# Altium PCB LimeSDR-Micro_mPCIe_1v4.PcbDoc (part 6 of 11)
Units mm, origin at the board's own origin, x right, y up, seen from the top; angles counter-clockwise.
Board outline 50.8 x 29.7 mm, 8 copper layers (Top, L2, L3, L4, L5, L6, L7, Bottom), stack 0.925 mm thick; 664 components, 386 nets, 2358 pads, 843 vias.
Unrouted connection lines stored in the file: 28.
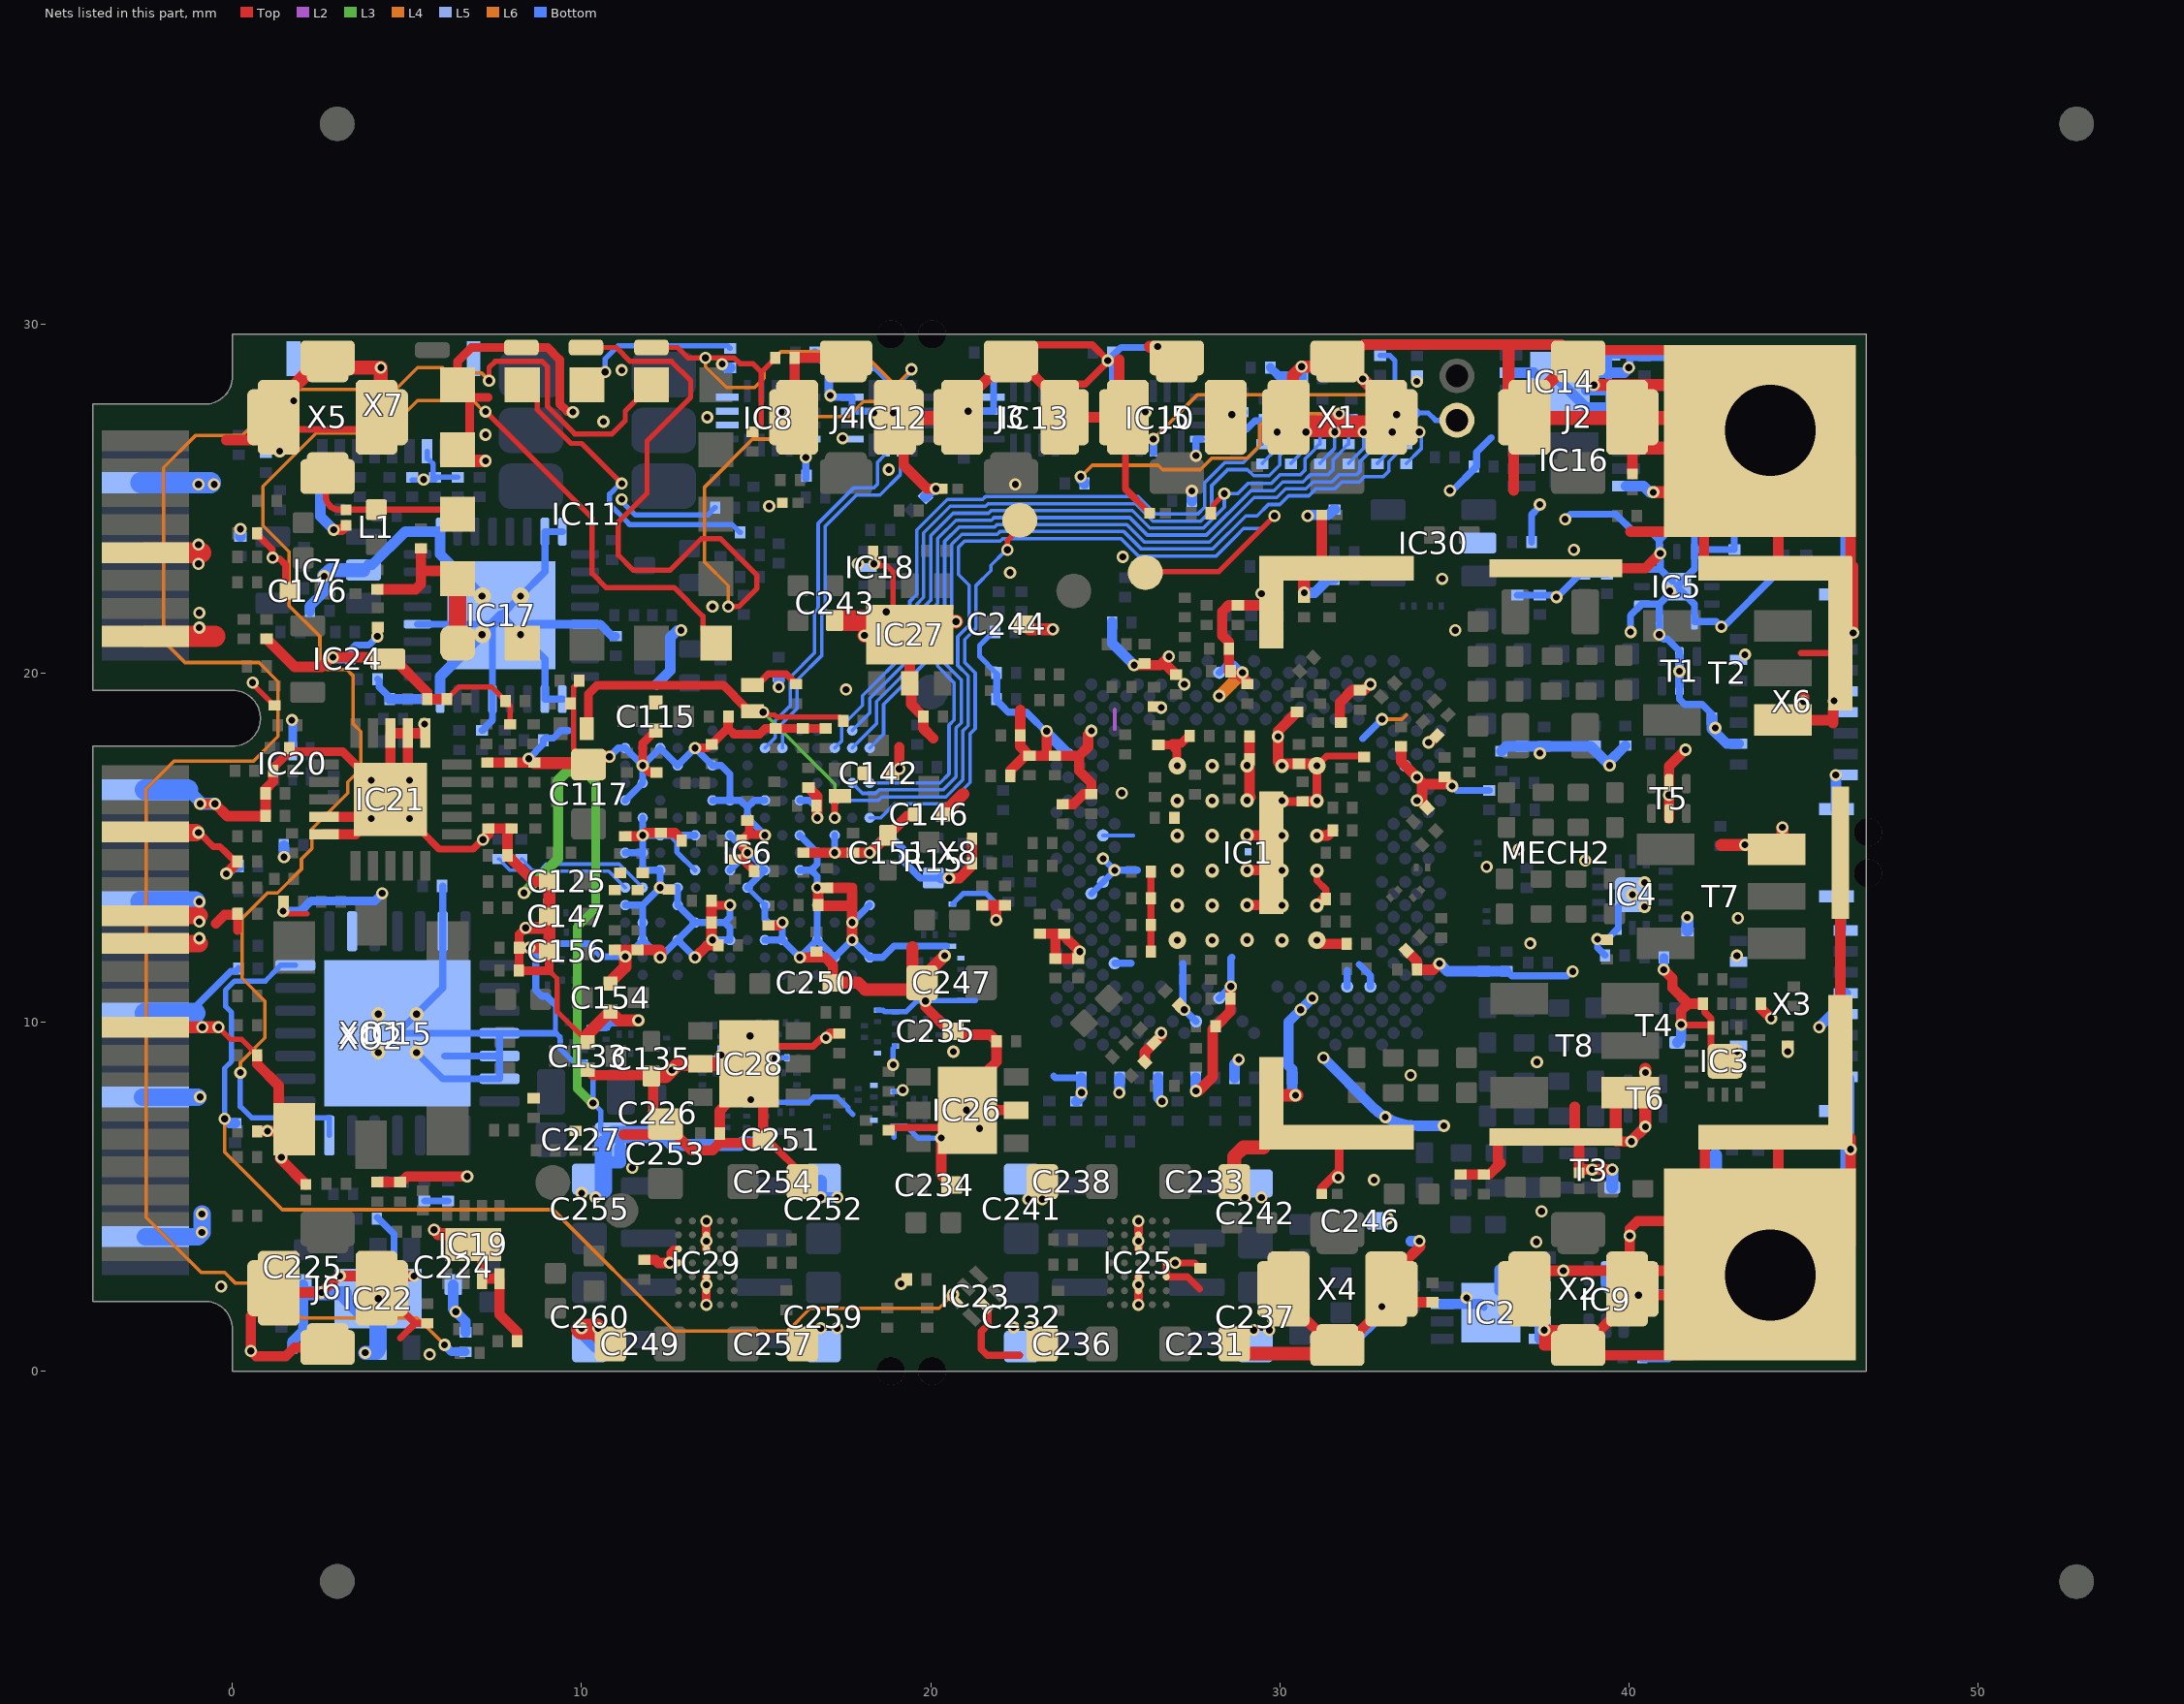
[diagram p10: the nets of this part, all layers, seen from the top]

## Via types
v1: diameter 0.35, hole 0.2, Top to Bottom, tented both sides, 684 vias
v2: diameter 0.35, hole 0.2, L5 to Bottom, tented both sides, 117 vias
v3: diameter 0.4, hole 0.2, Top to Bottom, tented both sides, 30 vias
v4: diameter 0.5, hole 0.2, Top to Bottom, tented both sides, 12 vias

## Nets (pads, with @x,y where several pads share a name; then routed paths per layer and width w, separated by ;. In a path a pad name is that pad's centre, name@x,y a point inside that pad or via, vN(x,y) a via of type N, cw(c..) or ccw(c..) an arc to the next point about the centre after c; other vN are vias at no path point) (continued)
GND: C1.1 C3.2 C4.1 C6.2 C7.1 C9.2 C11.1 C14.2 C16.1 C19.2 C21.1 C24.2 C26.1 C28.2 C29.1 C30.1 C31.2 C32.2 C33.1 C34.1 C35.2 C36.2 C37.2 C38.2 C42.2 C43.2 C44.2 C45.2 C46.2 C47.2 C48.2 C49.2 C50.2 C51.2 C52.2 C53.2 C54.2 C55.1 C56.2 C57.2 C58.2 C59.2 C60.2 C61.2 C62.2 C63.2 C64.2 C65.2 C66.2 C67.2 C68.2 C69.1 C70.2 C71.2 C72.2 C73.2 C74.2 C75.2 C76.1 C77.2 C78.1 C79.1 C80.2 C81.2 C82.2 C83.2 C84.2 C85.2 C86.2 C87.2 C88.2 C89.2 C90.2 C91.2 C92.2 C93.2 C94.2 C95.2 C96.2 C97.2 C98.2 C99.2 C100.2 C101.2 C102.2 C103.2 C104.2 C105.2 C106.2 C107.2 C108.2 C109.2 C113.2 C115.2 C117.1 C118.1 C119.1 C120.1 C121.1 C122.2 C125.1 C126.2 C127.2 C128.1 C129.1 C131.1 C132.2 C133.2 C134.1 C135.1 C136.1 C137.1 C138.1 C139.1 C140.1 C141.1 C142.2 C143.1 C144.1 C145.1 C146.2 C147.1 C148.2 C149.2 C150.1 C151.1 C152.1 C153.1 C154.2 C155.1 C156.1 C157.1 C158.1 C159.1 C160.1 C161.1 C162.2 C163.1 C164.2 C165.2 C166.2 C167.2 C168.2 C169.2 C170.1 C171.2 C172.1 C173.2 C174.2 C175.1 C176.1 C177.2 C178.2 C179.2 C180.2 C181.2 C182.1 C183.1 C186.1 C187.2 C188.1 C189.1 C190.1 C193.1 C194.2 C195.2 C196.1 C197.1 C198.2 C199.1 C200.1 C201.1 C202.2 C203.1 C204.2 C205.2 C206.1 C207.1 C208.1 C209.1 C210.2 C213.1 C214.1 C215.2 C216.1 C219.1 C220.1 C222.1 C223.2 C224.1 C225.1 C226.1 C227.1 C228.2 C229.2 C230.1 C231.1 C232.1 C233.1 C234.1 C235.1 C236.1 C237.1 C238.1 C239.1 C240.2 C241.1 C242.1 C243.1 C244.1 C245.1 C246.1 C247.1 C248.2 C249.1 C250.1 C251.1 C252.1 C253.1 C254.1 C255.1 C256.1 C257.1 C258.2 C259.1 C260.1 C261.2 C262.2 ESD1.2 ESD2.2 ESD3.2 ESD4.2 ESD5.2 ESD6.2 ESD7.2 ESD8.2 ESD9.2 IC1.AA31 IC1.AF32 IC1.AG29 IC1.AJ7 IC1.AJ9 IC1.AJ19 IC1.AK12 IC1.AK20 IC1.AL13 IC1.AL23 IC1.AM22 IC1.AN25 IC1.B18 IC1.B20 IC1.C7 IC1.C23 IC1.D20 IC1.E25 IC1.F6 IC1.G31 IC1.GND IC1.H2 IC1.J33 IC1.K4 IC1.L3 IC1.N3 IC1.T30 IC1.V30 IC1.W29 IC1.Y30 IC2.1 IC2.2 IC2.3 IC2.4 IC2.7 IC2.PAD IC3.7 IC3.EP IC4.7 IC4.EP IC5.1 IC5.3 IC5.4 IC5.6 IC5.10 IC5.12 IC5.EP IC6.B1 IC6.B3 IC6.B5 IC6.B11 IC6.B13 IC6.B15 IC6.C2 IC6.C4 IC6.C6 IC6.C7 IC6.C9 IC6.C10 IC6.C12 IC6.C14 IC6.D2 IC6.D5 IC6.D6 IC6.D10 IC6.D14 IC6.E1 IC6.E4 IC6.E7 IC6.E9 IC6.E12 IC6.E15 IC6.F3 IC6.F4 IC6.F8 IC6.F12 IC6.G2 IC6.G3 IC6.G5 IC6.G7 IC6.G9 IC6.G11 IC6.H1 IC6.H2 IC6.H8 IC6.H12 IC6.H13 IC6.H14 IC6.H15 IC6.J2 IC6.J3 IC6.J5 IC6.J7 IC6.J9 IC6.J11 IC6.J13 IC6.K2 IC6.K8 IC6.K12 IC6.L1 IC6.L6 IC6.L7 IC6.L9 IC6.L11 IC6.M2 IC6.N2 IC6.N4 IC6.N6 IC6.P1 IC6.P3 IC6.P5 IC7.2 IC8.6 IC8.7 IC8.8 IC8.16 IC9.2 IC10.7 IC10.8 IC10.16 IC11.1 IC11.2 IC11.4 IC11.5 IC11.16 IC12.5 IC12.7 IC12.8 IC13.7 IC13.8 IC14.1 IC14.2 IC14.3 IC14.4 IC14.7 IC14.PAD IC15.2 IC15.6 IC15.11 IC15.12 IC15.13 IC15.PAD IC16.4 IC17.4 IC17.9 IC17.15 IC17.16 IC17.21 IC17.25 IC17.26 IC17.29 IC17.32 IC18.2 IC19.3 IC19.4 IC19.PAD IC20.2 IC21.1 IC21.2 IC21.3 IC21.9 IC21.10 IC21.21 IC22.2 IC22.PAD IC23.2 IC24.3 IC25.A3 IC25.B3 IC25.C1 IC25.C3 IC25.D1 IC25.E3 IC25.F3 IC25.G3 IC26.2 IC26.PAD IC27.2 IC27.PAD IC28.2 IC28.PAD IC29.A3 IC29.B3 IC29.C1 IC29.C3 IC29.D1 IC29.E3 IC29.F3 IC29.G3 IC30.2 J2.2 J3.2 J4.2 J5.2 J6.2 MECH2.1 pad.2@8.275,29.325 R3.1 R15.1 R17.1 R25.1 R29.2 R32.1 R35.2 R38.2 R40.1 R45.2 R47.1 R52.2 R56.1 R62.2 R63.2 R64.2 R77.1 R85.2 R88.1 R99.2 R100.2 R101.2 R102.2 R103.2 R104.2 R105.2 R106.2 R107.2 R122.2 R123.2 R124.2 R125.2 R126.2 R127.2 R128.2 R129.2 R134.2 R135.1 R138.2 R141.1 R143.1 R146.2 R148.2 R158.1 R161.2 R165.2 R166.2 R174.1 R177.2 R178.2 R179.2 R192.2 R193.2 R196.2 R209.2 R212.2 R217.2 T1.2 T1.5 T2.3 T3.1 T4.1 T5.2 T5.5 T6.2 T6.5 T7.1 T8.3 X1.2 X2.2 X3.1 X3.4 X3.7 X3.9 X3.12 X3.15 X3.MP1 X3.MP2 X4.2 X5.2 X6.1 X6.4 X6.7 X6.9 X6.12 X6.15 X6.MP1 X6.MP2 X7.7 X7.MECH X8.0 X8.4 X8.9 X8.15 X8.18 X8.21 X8.26 X8.27 X8.29 X8.34 X8.35 X8.40 X8.50 XO1.2 XO2.2 | length 688.2
  Top w0.11: v1@28.264,19.344 v1(28.267,19.341)
  Top w0.15: v1(-0.4,9.85) -0.05,9.5 0.267,9.5 0.617,9.15 0.629,9.15 0.704,9.075 R141.1@0.704,9.05 ; v1(0.575,19.725) 0.575,19.683 R193.2@1.194,19.064 ; v1(1.45,13.175) 1.525,13.1 2.135,13.1 ; C220.1@6.145,19.262 6.483,19.6 7.42,19.6 7.95,19.07 C222.1@7.95,18.53 ; C220.1@6.22,19.2 C220.1@6.22,19.212 ; C220.1@6.22,19.25 C220.1@6.22,19.262 ; 9.07,11.47 9.3,11.24 9.3,10.3 C133.2@10.175,9.425 ; C117.1@9.925,17.42 9.798,17.547 9.798,17.815 9.775,17.838 9.775,19.595 9.93,19.75 C190.1@9.93,19.775 ; v1@18.5,23.175 v1@18.525,23.15 ; v1@18.525,23.075 18.75,23.075 18.925,22.9 IC27.PAD@18.925,21.75 ; J5.2@25.35,27.325 J5.2@25.575,27.1
  Top w0.18: 44.925,20.575 MECH2.1@46.25,20.575
  Top w0.2: v1@-0.95,15.425 -0.55,15.025 -0.355,15.025 -0.205,14.875 0.107,14.562 R174.1@0.122,14.547 ; R134.2@0.705,23.999 0.705,23.974 1.141,23.538 1.141,23.309 v1(1.15,23.3) 1.179,23.271 1.354,23.271 1.525,23.1 1.525,22.475 ccw(c1.65,22.475) C176.1@1.65,22.35 ; X5.2@0.975,26.975 X5.2@4.15,26.975 ; J6.2@4.65,1.95 5.23,1.37 ; 4.806,0.946 5.23,1.37 ; IC21.21@5.375,15.5 5.925,14.95 6.887,14.95 7.162,15.225 v1(7.175,15.225) ; C205.2@5.448,1.37 5.23,1.37 ; C190.1@9.93,19.775 9.93,19.8 C190.1@9.98,19.85 ; v1@12.509,3.1 v1(12.525,3.1) ; IC29.D1@12.775,3.1 v1(12.525,3.1) ; IC29.C1@12.775,3.5 12.625,3.5 12.525,3.4 v1(12.525,3.1) ; IC28.PAD@15.2,9.275 15.225,9.3 16.633,9.3 16.854,9.521 16.971,9.521 v1(17,9.55) ; C251.1@15.3,6.66 C254.1@16.468,5.493 ; R196.2@18.8,6.905 18.87,6.975 IC26.PAD@20.575,6.975 ; IC23.2@21.531,1.894 21.531,1.858 21.652,1.738 21.652,1.332 21.45,1.13 21.45,0.625 21.625,0.45 22.55,0.45 ; J3.2@22.9,29.4 24.63,29.4 v1@25.078,28.953 ; J3.2@24.025,28.275 24.425,28.275 v1@25.075,28.925 ; J5.2@25.575,27.1 25.575,25.275 ESD8.2@26.275,24.575 ; C60.2@26.307,12.015 C59.2@26.307,12.785 C62.2@26.307,13.54 C61.2@26.307,14.31 ; v1(26.602,19.008) v1@26.643,19.008 ; 27.702,2.356 27.358,2.7 IC25.C1@26.75,2.7 IC25.D1@26.75,3.1 v1(27,3.1) 27.565,3.1 C240.2@27.725,2.94 ; v3(31.065,14.34) 31.065,14.051 31.32,13.795 C76.1@31.32,13.525 ; v4@31.122,17.397 31.345,17.62 32.397,17.62 C78.1@32.422,17.595 ; v1@41.5,9.914 IC3.7@42.35,9.914 ; C44.2@42.12,10.525 42.17,10.475 42.17,10.28 42.35,10.1 IC3.7@42.35,9.914 ; IC3.EP@42.35,9.225 IC3.7@42.35,9.827 IC3.7@42.35,9.914
  Top w0.25: 0.145,12.615 C213.1@0.145,13.075 ; C208.1@1.165,17.2 1.165,17.225 1.19,17.25 1.19,17.308 1.632,17.75 3.15,17.75 v4(3.975,16.925) IC21.21@4.525,16.375 ; IC11.5@6.175,27.9 7.325,27.9 ; IC11.4@6.45,26.4 6.8,26.75 6.8,27.9 IC11.5@6.45,28.25 6.45,28.925 6.85,29.325 pad.2@8.275,29.325 9.025,29.325 9.375,28.975 9.375,27.707 9.588,27.494 9.731,27.494 v1(9.75,27.475) ; C215.2@7.975,17.42 8.31,17.42 ; C195.2@8.205,11.47 9.07,11.47 C156.1@9.07,12.025 ; C195.2@8.205,11.475 C194.2@8.205,12.125 ; C194.2@8.215,12.125 8.215,12.515 v1(8.4,12.7) ; C156.1@8.975,12.125 C156.1@9.075,12.025 ; 9.075,12.7 C147.1@9.075,13.025 ; C154.2@10.825,11.1 C154.2@10.825,11.15 ; C115.2@12.125,18.35 11.75,17.975 v1(11.751,17.35) v1(11.751,17.35) 11.956,17.145 C121.1@12.15,17.145 ; v1(13.251,17.85) 13.595,17.85 13.7,17.955 C120.1@13.725,17.955 13.75,17.955 13.775,17.98 13.775,18.005 14.185,18.415 14.185,18.73 C119.1@14.205,18.75 14.205,18.41 14.365,18.25 15.1,18.25 15.26,18.41 C145.1@15.563,18.41 C144.1@16.338,18.41 C143.1@16.988,18.41 ; v1(13.575,1.9) IC29.F3@13.575,2.3 IC29.E3@13.575,2.7 ; IC29.C3@13.575,3.5 v1(13.575,3.725) IC29.B3@13.575,3.9 v1(13.575,4.3) ; C141.1@13.72,13.345 13.745,13.37 13.75,13.37 13.77,13.35 v1(14.251,13.35) ; C137.1@14.58,15.2 14.749,15.369 14.8,15.369 ; C137.1@14.605,15.175 14.605,15.023 v1@14.671,14.957 ; C129.1@14.75,15.77 14.775,15.77 14.8,15.745 14.8,15.369 ; v1(14.751,14.85) 14.62,14.719 14.62,14.65 C140.1@14.945,14.325 ; v1(15.251,15.35) 15.232,15.369 14.8,15.369 ; v1(25.95,1.9) IC25.B3@25.95,2.3 v1(25.95,2.475) IC25.C3@25.95,2.7 ; IC25.E3@25.95,3.5 v1(25.95,3.725) IC25.F3@25.95,3.9 v1(25.95,4.3) ; C52.2@26.524,17.941 26.886,17.941 ; v4(27.065,17.34) 27.045,17.36 27.045,17.781 26.886,17.941 ; C69.1@27.42,18.225 27.17,17.975 26.92,17.975 26.886,17.941 ; MECH2.1@30.065,16.32 R35.2@30.65,16.32 ; v3(31.065,16.34) v4(31.065,17.34) ; ESD3.2@31.2,5.075 31.2,5.248 31.7,5.748 31.7,6.634 MECH2.1@31.634,6.7
  Top w0.3: v1(-0.925,16.25) v1(-0.5,16.25) -0.15,15.9 C209.1@0.82,15.9 ; -0.475,12.825 -0.225,13.075 C213.1@0.145,13.075 ; v1(-0.175,14.25) R174.1@0.122,14.547 ; -0.175,26.675 X5.2@0.625,26.675 ; R143.1@0.705,6.875 v1(1,6.875) XO1.2@1.37,6.875 ; R141.1@0.704,9.05 0.704,8.796 1.325,8.175 XO1.2@1.325,7.35 ; C209.1@0.92,15.875 0.945,15.875 C209.1@0.945,15.9 C207.1@0.945,16.55 0.945,16.669 1.165,16.889 C208.1@1.165,17.2 ; C229.2@0.975,20.977 1,20.977 1,20.952 1.777,20.175 2.557,20.175 2.832,20.45 v1(2.875,20.45) 4.575,20.45 5.58,19.445 C219.1@5.58,19.25 ; v1@1.363,6.088 ESD9.2@2.1,5.35 ; v1@1.465,13.175 C223.2@1.465,13.45 ; IC21.10@2.625,15.375 3.525,15.375 v4(3.975,15.825) ; IC21.9@2.625,15.875 IC21.21@3.975,15.875 ; J6.2@2.725,0.675 1.775,0.675 1.525,0.425 0.675,0.425 v1(0.525,0.575) 0.525,1.575 J6.2@1.325,2.375 1.45,2.25 v1(2.55,2.25) 3.025,2.725 v1(3.075,2.725) J6.2@4.225,2.725 ; v1(2.9,24.1) 3.125,24.1 ESD4.2@3.25,24.225 ; C204.2@4.15,5.415 4.78,5.415 R161.2@4.805,5.415 4.841,5.415 5.001,5.575 v1(6.725,5.575) ; C165.2@4.15,22.395 5.245,22.395 5.4,22.55 5.4,22.925 ; v1@4.16,21.025 C175.1@4.16,21.26 ; v1(4.175,2.075) 4.125,2.075 J6.2@4.425,2.375 ; IC21.21@4.525,16.925 IC21.3@4.525,18.275 IC21.2@5.025,18.275 ; J6.2@4.83,2.725 v1(5.2,2.725) ; IC21.21@5.025,16.925 IC21.2@5.025,18.275 ; C186.1@5.4,23.57 5.4,22.925 ; IC21.1@5.525,18.535 IC21.1@5.525,18.275 IC21.2@5.025,18.275 ; C219.1@5.562,19.25 C219.1@5.58,19.25 ; C220.1@6.132,19.25 C219.1@5.58,19.25 ; IC11.2@6.223,22.8 IC11.2@6.323,22.7 ; IC19.PAD@6.425,3.825 6.625,3.825 7.15,3.3 IC19.3@7.15,2.7 ; IC11.1@6.45,20.85 IC11.1@6.55,20.75 ; IC11.2@6.45,22.7 6.145,22.395 6.145,22.925 5.4,22.925 ; IC19.3@7.15,2.65 IC19.4@7.65,2.65 7.65,1.625 8.155,1.12 R158.1@8.155,0.85 ; v1(7.175,15.225) 7.325,15.375 C214.1@7.325,15.545 7.35,15.545 C210.2@8,15.545 7.88,15.425 R177.2@7.88,14.775 7.88,14.75 7.906,14.75 8.631,14.025 C125.1@9.075,14.025 ; R178.2@7.3,17.43 8.31,17.43 ; C215.2@7.975,17.43 C216.1@8.65,17.43 ; C194.2@8.205,12.125 C194.2@8.21,12.125 8.215,12.125 C156.1@8.975,12.125 ; C133.2@10.175,8.625 10.325,8.475 11.975,8.475 C135.1@12,8.45 12.05,8.4 12.05,7.375 12.35,7.075 C253.1@12.4,7.075 12.45,7.075 12.75,6.775 12.75,6.725 13.15,6.325 13.75,6.325 13.96,6.535 ; C157.1@10.95,12.07 C155.1@11.6,12.07 12.25,12.07 ; 11.2,6.775 C253.1@12.225,6.775 ; C118.1@11.25,15.32 11.721,15.32 v1(11.751,15.35) 11.821,15.42 C122.2@12.275,15.42 12.675,15.42 C139.1@12.87,15.225 ; C258.2@11.8,3.185 12.115,3.185 12.2,3.1 v1@12.509,3.1 ; v1(13.251,11.85) 13.601,12.2 C136.1@13.92,12.2 ; v1@13.72,12.294 R99.2@13.72,12.775 ; R99.2@13.72,12.85 C141.1@13.72,13.345 ; IC28.PAD@14.175,7.75 14.175,7.671 13.96,7.456 C256.1@13.96,6.805 13.96,6.535 ; 14.874,6.535 13.96,6.535 ; 14.875,6.535 15.1,6.535 C251.1@15.2,6.635 IC28.PAD@15.2,8.025 ; C149.2@15.35,12.77 15.671,12.77 v1(15.751,12.85) ; J4.2@16.105,27.555 C167.2@16.105,29.025 J4.2@17.575,29.025 ; v1@16.251,11.825 v1(16.251,11.85) 16.975,11.85 17.2,11.625 C250.1@17.2,11.125 ; C153.1@16.35,14.85 v1(17.251,14.85) C138.1@17.775,14.85 v1(18.251,14.85) 18.275,14.85 18.625,15.2 18.675,15.2 18.775,15.3 C151.1@18.775,15.35 18.775,15.4 18.875,15.5 18.925,15.5 19.325,15.9 19.5,15.9 C146.2@19.55,15.95 ; C113.2@16.5,16.72 16.751,16.469 v1(16.751,15.85) ; C148.2@16.775,13.33 v1@16.775,13.845 ; C148.2@16.875,13.33 17.751,13.33 ; v1(17,9.55) 17.12,9.67 R212.2@17.375,9.67 ; C150.1@17.025,13.845 17.725,13.845 ; v1(17.751,12.35) 17.751,12.6 v1(17.751,12.85) 17.751,13.33 ; 17.751,13.845 17.751,13.33 ; C142.2@18.75,17.125 18.975,17.125 v1(19.1,17.25) 19.1,17.875 ; v1(19.15,2.5) 19.275,2.625 C228.2@19.32,2.625 ; J4.2@19.225,26.825 19.225,25.95 19.9,25.275 ESD6.2@20.325,25.275 ; IC27.PAD@19.4,21.1 19.4,21.075 IC27.2@19.4,19.7 19.44,19.66 19.44,19.104 19.765,18.78 19.79,18.78 C245.1@19.79,18.755 19.79,18.41 20.075,18.125 ; v1(19.85,10.6) 19.85,10.436 C235.1@20.496,9.79 ; IC27.PAD@20.1,20.625 IC27.PAD@20.425,20.625 ; v1(20.3,6.675) 20.3,5.625 C234.1@20.6,5.325 ; v1@20.575,14.125 20.825,14.125 21.186,14.486 C93.2@21.186,14.541 C92.2@21.186,15.258 ; C235.1@20.646,9.636 21.699,9.636 21.865,9.47 21.89,9.47 C239.1@21.89,9.445 21.89,8.865 IC26.PAD@21.575,8.55 ; J3.2@21.3,28.1 J3.2@21.972,28.772 ; IC26.PAD@21.397,7.475 IC26.2@22.45,7.475 ; C95.2@21.475,13.34 C94.2@22.13,13.34 ; v1(21.875,12.925) 21.875,13.262 ; R25.1@22.28,17.05 22.28,17.205 C57.2@22.725,17.65 ; 22.565,18.939 22.565,17.895 C57.2@22.83,17.629 C58.2@23.4,17.629 ; J3.2@22.678,28.797 J3.2@23.35,28.125 ; C89.2@23.125,12.531 23.756,12.531 v1(24.271,12.015) 24.073,11.817 C96.2@23.575,11.817 23.575,12.521 ; v1(23.325,18.337) 23.325,17.704 C58.2@23.4,17.629 ; C51.2@23.785,16.238 24.088,16.238 24.38,16.53 C50.2@24.6,16.53 24.6,16.85 24.254,17.196 24.254,17.629 ; J3.2@24,27.325 J5.2@25.35,27.325 ; v1(24.604,18.342) 24.604,18.329 24.512,18.237 24.512,17.887 24.254,17.629 ; J5.2@25.4,28.025 25.4,28.975 ; v1(25.825,20.225) 26.575,20.225 v1(26.825,20.475) ; C108.2@26.135,8.86 26.135,9.14 C106.2@26.398,9.402 26.602,9.606 v1(26.602,9.684) ; 26.7,20.35 26.7,20.275 C99.2@27.025,19.95 ; C70.2@27.123,10.495 v1(27.268,10.35) ; v1@27.675,8.025 28.075,8.425 28.075,9.789 C102.2@28.161,9.875 28.161,9.9 28.186,9.9 28.586,10.3 C56.2@28.586,10.675 v1@28.586,10.988 ; v3(29.065,13.35) MECH2.1@29.49,13.35 ; v3(29.065,14.35) MECH2.1@29.49,14.35 ; v3(29.065,15.35) MECH2.1@29.49,15.35 ; v3(29.065,16.35) v3@29.16,16.446 ; C101.2@29.075,19.68 29.075,19.73 28.83,19.975 28.619,19.975 28.544,20.05 28.544,20.881 28.35,21.075 28.35,21.75 28.535,21.935 C53.2@28.8,21.935 MECH2.1@29.759,21.935 ; v3@29.135,16.446 C68.2@29.135,17.528 C67.2@29.135,18.18 ; X1.2@29.95,26.725 X1.2@30.55,26.725 ; v3(30.065,17.34) 29.95,17.455 v1(29.95,18.175) 29.95,18.336 C100.2@30.495,18.881 ; v3@30.065,17.395 C109.2@30.55,17.395 v4@31.065,17.395 ; X1.2@30.123,27.325 X1.2@30.377,27.325 ; X1.2@30.377,27.225 X1.2@33.177,27.225 ; R35.2@30.65,16.32 v3@31.065,16.32 ; X4.2@30.75,1.475 X4.2@31.245,0.98 ; v4(31.065,12.34) 31.165,12.24 C83.2@31.917,12.24 ; v3(31.065,13.34) 31.25,13.525 C76.1@31.32,13.525 ; v3(31.065,15.34) 31.371,15.34 C55.1@31.521,15.49 ; MECH2.1@31.2,22.975 ESD1.2@31.2,24.525 ; C107.2@31.725,18.58 31.725,19.15 32.08,19.505 C65.2@32.3,19.505 32.414,19.505 32.583,19.674 v1(32.597,19.674) ; X1.2@31.875,28.875 32.405,29.405 38.07,29.405 J2.2@38.55,28.925 ; X4.2@32.105,0.955 X4.2@32.6,1.45 ; X4.2@32.925,1.97 C28.2@34.375,1.97 ; C63.2@33.475,17.895 33.475,17.464 v1(33.929,17.01) 34.075,16.864 34.075,16.283 C64.2@34.22,16.138 ; X4.2@33.525,3.075 v1@34.02,3.57 ; C104.2@33.625,12.05 33.93,11.745 C75.2@33.93,11.5 34.4,11.5 v1(34.575,11.675) ; 34.2,16.814 34.725,16.814 ; v1@34.298,18.002 C98.2@34.498,18.202 ; C77.2@34.725,16.97 v1(34.937,16.758) ; C38.2@35.302,5.63 C37.2@35.85,5.63 ; C37.2@36,5.63 36.325,5.955 ; 36.25,5.955 MECH2.1@36.25,6.575 ; 36.7,25.225 36.7,26.875 J2.2@36.925,27.1 ; J2.2@37.15,27.325 37.125,27.3 J2.2@36.925,27.1 ; X2.2@37.25,2.875 v1(38.125,2.875) X2.2@40.025,2.875 ; J2.2@37.325,27.1 J2.2@36.925,27.1 ; 37.575,0.727 X2.2@38.275,0.727 ; 37.575,0.777 v1(37.575,1.175) ; X2.2@37.575,1.776 v1(37.575,1.175) ; 37.65,0.777 v1@37.65,1.175 ; X2.2@38.176,1.175 v1@37.65,1.175 ; MECH2.1@38.45,6.825 38.45,7.575 ; MECH2.1@38.575,6.525 38.575,5.775 v1(38.95,5.775) v1(39.525,5.775) ; X2.2@38.725,0.45 X8.0@41.779,0.45 ; J2.2@38.775,29.25 X8.0@44.44,29.25 ; v1(39,28.25) J2.2@39,28.95 ; X2.2@39.075,1.075 X2.2@39.57,1.57 ; MECH2.1@39.45,23 40.475,23 v1(40.9,23.425) ; J2.2@39.55,26.4 J2.2@40.1,26.4 ; MECH2.1@39.65,6.575 v1@40.05,6.575 ; 40.05,24.05 X8.0@42.15,24.05 ; v1(40.075,6.575) v1@40.05,6.575 ; ESD5.2@40.1,25.7 J2.2@40.1,26.4 ; J2.2@40.1,27.2 J2.2@40.1,26.4 ; J2.2@40.25,27.325 X8.0@45.915,27.325 ; v1(40.475,7) v1@40.05,6.575 ; v1(41,11.5) 41.25,11.25 41.25,10.975 41.7,10.525 ; T5.5@41.15,15.825 T5.5@41.15,15.975 v1(41.15,16.5) T5.2@41.15,16.825 41.15,17.325 v1(41.625,17.8) ; X8.0@41.179,2.875 X2.2@40.025,2.875 ; v1(41.5,9.925) 41.5,10.325 41.7,10.525 ; X8.0@41.65,4.3 40.25,4.3 40.025,4.075 v1(40.025,3.875) X2.2@40.025,2.875 ; C44.2@42.12,10.525 41.7,10.525 ; MECH2.1@42.15,23.275 42.15,24.075 X8.0@42.15,26.329 ; X8.0@42.175,3.421 MECH2.1@42.175,6.475 ; X8.0@43.329,2.175 v1(40.275,2.175) 40.025,2.425 X2.2@40.025,2.875 ; C45.2@43.78,10.525 43.78,10.395 v1(44.075,10.1) ; X8.0@44.284,3.646 MECH2.1@44.284,6.7 ; MECH2.1@44.284,23 X8.0@44.284,26.054 ; v1(44.55,9.15) C48.2@44.55,9.32 ; X8.0@45.215,26.4 J2.2@40.1,26.4 ; 45.275,18.65 45.7,18.65 ; 45.85,18.563 MECH2.1@45.85,18.987 ; MECH2.1@46.059,8.475 MECH2.1@46.059,8.575 MECH2.1@46.059,14.85 ; X8.0@46.35,3.621 v1(46.35,6.35) MECH2.1@46.35,6.675 ; X8.0@46.35,26.179 46.35,23.125 46.425,23.05 v1(46.425,21.15) ; C58.2@23.4,17.629 C58.2@23.564,17.629 24.254,17.629 ; v1(37.575,1.175) v1@37.65,1.175
  Top w0.35: X8.35@-3.485,9.85 X8.35@-2.5,9.85 v1(-0.865,9.85) v1(-0.4,9.85) ; v1(1.4,6.125) XO1.2@1.4,6.495 ; v1(5.775,4.05) 5.9,3.925 6.325,3.925 IC19.PAD@6.425,3.825 ; IC11.4@6.65,26.075 v1(7.25,26.075) ; v1(8.4,12.7) 9.075,12.7 C156.1@9.075,12.025 ; C216.1@8.645,17.42 9.925,17.42 10.155,17.42 C117.1@10.2,17.375 10.425,17.6 v1(10.8,17.6) ; C147.1@9.075,13.025 C125.1@9.075,14.025 ; C133.2@10.175,9.425 10.175,9.65 C154.2@10.825,10.3 11.075,10.05 v1(11.625,10.05) ; C154.2@10.825,11.15 11.251,11.576 v1(11.251,11.875) ; v1(12.251,11.85) v1@12.251,12.02 ; C250.1@17.2,11.125 17.925,11.125 18.122,10.928 19.553,10.928 C247.1@19.75,11.125 ; 19.475,12.135 19.475,10.975 v1(20.4,11.9) ; C146.2@20.35,15.95 20.93,16.53 ; C244.1@22.675,21.4 22.825,21.25 v1(23.5,21.25) ; J5.2@26.276,29.35 v1(26.5,29.35) ; MECH2.1@29.886,7.802 29.984,7.9 v1(30.45,7.9) v1@30.5,7.9 ; X1.2@30.123,26.925 X1.2@33.177,26.925 ; X1.2@30.377,27.325 30.377,28.527 v1(30.625,28.775) X1.2@30.974,28.775 ; C66.2@30.7,22.18 v1(30.7,22.3) MECH2.1@30.7,23.075 ; X1.2@32.128,28.672 v1(32.375,28.425) X1.2@32.622,28.178 ; J2.2@36.55,28.2 36.55,29.375 ; J2.2@37.625,28.225 J2.2@38.15,28.75 ; v1(39,28.25) X8.0@44.665,28.25 ; MECH2.1@39.625,6.9 T8.3@39.625,7.675 ; J2.2@40.425,26.45 X8.0@41.925,26.45 ; v1@40.475,7.05 v1(40.475,8.55) v1@40.475,8.65 ; v1(40.7,25.175) X8.0@41.7,25.175 ; X8.0@42.15,24.075 X8.0@42.175,24.075 ; 42.653,15.075 v1(43.325,15.075) 44.098,15.075 T7.1@44.228,14.945 44.4,15.117 v1(44.4,15.575) ; T2.3@45,19.042 v1(45,19.175) v1@45,19.325
  Top w0.4: X5.2@1.627,28.077 X5.2@2.175,28.625 ; X5.2@3.475,28.75 v1(4.25,28.75) X5.2@4.25,27.975 ; C135.1@12,8.45 12.414,8.45 v1(12.588,8.625) 12.764,8.8 IC28.2@13.4,8.8 IC28.PAD@14.375,8.8 ; v1(18.1,21.075) 19.4,21.075 IC27.PAD@19.5,21.075 ; J4.2@19.102,27.3 J3.2@20.923,27.3 ; IC27.PAD@20.475,21.475 v1(20.725,21.475) ; C233.1@28.7,5.425 28.7,6.15 28.959,6.409 MECH2.1@29.534,6.409 ; 29.15,0.5 X4.2@31.2,0.5 ; MECH2.1@29.534,6.434 MECH2.1@29.812,6.712 ; J2.2@37.023,27.3 37.125,27.3 X8.0@42.688,27.3
  Top w0.5: X8.21@-2.6,15.425 v1@-1.05,15.425 ; X8.29@-2.5,12.25 v1@-0.95,12.25 ; X8.27@-2.5,13.05 -0.95,13.05 ; IC11.1@6.45,20.85 IC11.2@6.45,22.7
  Top w0.6: X8.15@-2.5,21.05 -0.5,21.05 ; X8.9@-2.5,23.45 -0.9,23.45 ; v1@10,1.2 v1@10.375,1.2 ; v1@10.375,1.225 C249.1@10.825,0.775 ; C243.1@17.3,21.5 IC27.PAD@18.475,21.5
  L2 w0.11: 25.27,18.395 25.27,18.943
  L3 w0.25: 9.55,17.15 10.1,17.15 10.4,16.85 10.4,13.25 9.875,12.725 9.875,8.1 v1@10.325,7.65
  L3 w0.3: v1(8.35,13.7) 9.325,14.675 9.325,16.925 9.55,17.15
  L4 w0.11: 25.27,18.395 25.27,18.943
  L4 w0.35: v1(28.267,19.341) v1(28.933,20.007)
  L5 w0.11: 25.27,18.395 25.27,18.943
  L6 w0.1: v1(32.93,18.675) 33.5,18.675 33.625,18.8
  Bottom w0.1: R129.2@29.5,25.995 29.5,26.013 29.925,26.438 v1(29.925,26.9) ; R124.2@30.325,25.995 30.325,26.013 30.75,26.438 v1(30.75,26.9) ; R125.2@31.15,25.995 31.15,26.013 31.575,26.438 v1(31.575,26.9) ; R123.2@31.975,25.995 31.975,26.013 32.4,26.438 v1(32.4,26.9) ; R126.2@32.8,25.995 32.8,26.013 33.225,26.438 v1(33.225,26.9) ; R122.2@33.625,25.995 34.05,26.42 v1@34.05,26.9
  Bottom w0.11: IC1.T30@24.937,15.345 25.805,15.345
  Bottom w0.12: C206.1@1.41,15.015 C206.1@1.47,15.075
  Bottom w0.15: C181.2@5.15,25.53 5.8,25.53 5.75,25.58 5.75,25.987 5.662,26.075 5.65,26.075 5.575,26.15 X7.7@5.575,26.35 ; C183.1@5.8,25.605 C182.1@6.45,25.605 ; 9.25,10.49 9.25,9.7 9.38,9.57 C11.1@9.38,9.405 9.38,9.242 9.762,8.86 R32.1@10.075,8.86 10.325,8.61 v1(10.325,7.675) 10.55,7.45 10.55,6.9 C227.1@10.825,6.625 ; v1(11.15,24.975) 11.15,24.921 11.25,24.821 11.25,24.818 11.543,24.525 13.612,24.525 C172.1@13.825,24.737 ; v1(11.251,11.875) IC6.C2@11.738,12.363 ; 12.725,15.2 12.725,14.876 IC6.G5@13.251,14.35 ; C1.1@13.79,8.925 C3.2@14.21,8.925 ; v1@14,8.998 R3.1@14,9.26 ; C16.1@14.725,7.635 R40.1@15.275,7.635 15.308,7.635 15.37,7.698 16.498,7.698 16.65,7.85 17.325,7.85 17.625,7.55 17.625,7.5 17.775,7.35 ; IC6.F8@14.751,13.85 IC6.E9@15.251,13.35 ; v1(14.751,14.85) IC6.G9@15.251,14.35 ; C6.2@15.365,8.975 C4.1@15.885,8.975 ; v1@15.625,8.998 R17.1@15.625,9.31 ; R56.1@18.475,10.34 18.635,10.34 18.68,10.295 C26.1@18.988,10.295 19.295,10.295 19.6,10.6 v1(19.85,10.6) ; v2(18.925,8.775) 18.925,9.242 18.955,9.273 18.955,9.305 C24.2@18.988,9.305 ; 18.95,6.692 C21.1@18.95,7.015 19.3,7.015 19.64,6.675 v1(20.3,6.675) ; C19.2@18.95,8.005 19.155,8.005 v2(19.2,8.05) ; v1@19.85,10.62 R104.2@20.865,10.62 21.28,10.62 ; R106.2@20.625,13.38 20.657,13.38 20.657,13.409 20.937,13.688 21.587,13.688 21.875,13.4 v1(21.875,12.925) ; C7.1@21.845,21.175 21.791,21.175 21.4,20.784 21.4,20.476 21.89,19.986 C91.2@21.89,19.95
  Bottom w0.2: -1.075,10.25 -1.075,10.425 -0.042,11.458 0.117,11.458 0.167,11.508 R138.2@0.167,11.533 ; C199.1@3.37,20.4 3.42,20.45 3.42,20.695 3.525,20.8 3.909,20.8 4.159,21.05 v1@4.192,21.05 ; R192.2@4.15,4.4 4.625,3.925 IC22.PAD@4.625,2.671 ; C198.2@4.155,19.825 4.205,19.775 4.205,19.598 4.455,19.348 4.455,19.3 C201.1@4.505,19.25 ; v4(5.075,16.925) v4@5.075,16.997 ; v3(5.275,9.125) 6.025,8.375 IC15.13@7.65,8.375 IC15.12@7.65,9.025 ; IC17.4@5.3,21.4 7.45,21.4 IC17.29@7.45,19.25 7.45,18.655 7.225,18.43 7.225,18.405 7.175,18.355 R148.2@7.15,18.355 ; C202.2@5.5,4.875 R165.2@6.175,4.875 ; C179.2@6.025,13.9 6.025,10.975 IC15.PAD@4.725,9.675 IC15.11@7.65,9.675 IC15.12@7.65,9.025 ; IC15.PAD@6.075,9.025 IC15.12@7.65,9.025 ; IC15.11@7.725,9.675 9.25,9.675 ; v1(8.485,17.545) 8.905,17.965 C193.1@8.905,18.075 8.905,18.087 8.955,18.137 9.192,18.137 9.405,18.35 9.625,18.35 ; v1(8.5,12.125) 8.69,11.935 R103.2@8.69,11.6 R102.2@8.69,11.05 8.69,10.915 8.862,10.742 8.998,10.742 9.25,10.49 ; R101.2@9.01,12.245 10.205,12.245 10.575,11.875 v1(11.251,11.875) ; IC17.25@9.45,19.25 IC17.26@8.95,19.25 8.95,20.4 v4(8.25,21.1) IC17.4@7.7,21.65 v4(8.25,22.2) 8.95,22.9 IC17.15@8.95,24.05 IC17.16@9.45,24.05 ; R29.2@10.25,9.84 C9.2@10.7,9.84 10.835,9.975 11.55,9.975 v1(11.625,10.05) ; v1(10.8,17.6) 11.05,17.85 IC6.P1@11.251,17.85 v1(11.751,17.35) ; IC6.E1@11.251,13.35 11.751,13.35 ; IC6.H1@11.251,14.85 IC6.H2@11.751,14.85 ; IC6.L1@11.251,16.35 IC6.M2@11.751,16.85 v1(11.751,17.35) ; IC6.J2@11.734,15.35 v1(11.751,15.35) ; IC6.C2@11.751,12.35 v1(12.251,11.85) IC6.C4@12.751,12.35 ; IC6.C2@11.751,12.363 IC6.D2@11.751,12.85 11.751,13.35 ; IC6.K2@11.751,15.85 v1(11.751,15.35) ; 12.52,15.35 IC6.J3@12.251,15.35 v1(11.751,15.35) ; 12.575,15.35 12.725,15.2 12.875,15.35 IC6.J5@13.251,15.35 ; v1(13.251,11.85) IC6.C4@12.751,12.35 ; v1(13.751,12.35) IC6.C7@14.251,12.35 14.251,12.699 14.1,12.85 ; IC6.L6@13.751,16.35 IC6.L7@14.251,16.35 ; v1(14.251,13.35) 14.251,13.001 14.1,12.85 ; IC6.G7@14.251,14.35 v1(14.751,14.85) IC6.J7@14.251,15.35 ; IC6.F8@14.751,13.85 IC6.G9@15.251,14.35 ; IC6.C9@15.251,12.35 IC6.C10@15.751,12.35 ; IC6.E9@15.251,13.35 15.251,12.949 15.375,12.825 15.655,12.825 15.661,12.831 15.732,12.831 v1(15.751,12.85) IC6.C10@15.751,12.35 ; v1(15.251,15.35) IC6.K8@14.751,15.85 14.751,16.149 ; IC6.L9@15.251,16.35 14.952,16.35 14.751,16.149 ; IC6.G11@16.251,14.35 16.575,14.35 ; IC6.J11@16.251,15.35 IC6.H12@16.751,14.85 ; IC6.L11@16.251,16.35 16.525,16.35 16.732,16.143 16.732,15.869 v1(16.751,15.85) ; C170.1@16.425,25.57 v1(16.425,26.175) 16.425,26.2 16.525,26.3 IC8.16@16.525,26.7 ; v1@17.15,27.9 IC12.8@17.75,27.9 IC12.7@17.75,27.5 18.375,27.5 v1@18.425,27.45 ; IC6.J13@17.251,15.35 v1(17.251,14.85) ; IC6.E15@18.251,13.35 v1(17.751,12.85) v1(17.751,12.35) ; R15.1@20.3,14.125 R15.1@20.075,14.125 19.7,14.125 19.2,14.625 19.2,14.975 18.95,15.225 18.575,15.225 18.2,14.85 IC6.H14@17.751,14.85 v1(17.251,14.85) ; 20.45,12.175 18.95,12.175 18.625,11.85 IC6.B15@18.251,11.85 v1(17.751,12.35) ; v1(21.075,27.5) IC13.7@21.8,27.5 ; IC13.7@21.806,27.5 21.806,27.9 C164.2@21.805,29.175 ; C91.2@21.89,19.95 C90.2@21.89,19.25 21.89,19.21 22.1,19 22.1,18.992 22.217,18.875 22.74,18.875 v1@23.4,18.215 ; 23.525,8.45 23.575,8.4 C71.2@24.315,8.4 ; IC1.AA31@24.604,13.68 v1(25.27,14.346) ; v1(24.937,14.679) v1(25.27,14.346) ; IC1.AG29@25.27,11.682 25.741,11.682 ; 25.925,14.35 25.274,14.35 v1(25.27,14.346) ; v1(26.15,27.475) 26.125,27.5 IC10.7@25.4,27.5 IC10.8@25.4,27.9 25.4,28.225 25.205,28.42 25.205,29.08 25.45,29.325 v1@26.5,29.325 ; v1(26.5,29.35) 26.7,29.35 ; 27.226,11.674 27.226,10.498 27.24,10.485 27.24,10.379 v1(27.268,10.35) IC1.AM22@27.601,10.017 ; v2(27.6,26.225) 27.6,26.7 IC10.16@27.75,26.7 ; IC1.AK20@28.267,10.683 v1(28.6,11.016) 28.6,11.825 28.625,11.85 ; IC1.B20@28.267,20.007 28.51,20.25 28.691,20.25 v1(28.933,20.007) ; IC1.AJ9@31.931,11.016 31.931,11.487 ; 32.275,11.65 32.597,11.328 IC1.AJ7@32.597,11.016 ; 32.377,18.123 v1(32.93,18.675) ; v1(34.875,25.225) 34.952,25.225 35.64,25.913 35.64,26.322 36.058,26.74 ; v1(34.937,16.758) 35.06,16.635 C105.2@36,16.635 ; IC2.PAD@35.75,1.925 IC2.PAD@35.85,1.825 ; C85.2@36.495,11.455 36.52,11.455 36.65,11.325 38.227,11.325 38.352,11.45 v1(38.392,11.45) ; C29.1@36.8,22.23 C31.2@37.45,22.23 37.997,22.23 38.597,22.83 C34.1@38.725,22.83 C36.2@39.375,22.83 ; C261.2@37.21,23.75 37.21,24.53 37.421,24.741 37.421,24.796 v1(37.45,24.825) ; v1(38.175,24.4) 38.325,24.55 39.625,24.55 40.15,24.025 40.65,24.025 40.875,23.8 ; C46.2@39.319,11.91 39.1,12.129 v1(39.1,12.375) 39.378,12.375 IC4.7@39.7,12.697 IC4.EP@39.7,13.3 ; IC14.4@39.425,27.6 IC14.3@39.425,28.1 IC14.2@39.425,28.6 IC14.1@39.425,29.1 40.025,29.1 ; v1@40.025,28.75 40.025,29.08 ; v1(40.05,21.175) 40.05,21.65 IC5.1@40.375,21.975 40.863,21.975 ; IC5.3@40.375,22.975 40.9,22.975 ; IC5.12@40.875,21.372 v2(40.875,21.1) 41,20.975 41.1,20.975 41.451,20.624 T1.5@41.451,20.475 ; IC5.12@40.875,21.475 40.875,21.975 IC5.EP@41.2,22.3 ; IC5.4@40.875,23.475 40.875,23.8 ; 40.9,23.225 40.9,22.975 ; IC5.EP@41.245,22.63 40.9,22.975 ; X8.0@41.35,24.275 40.875,23.8 ; T1.2@41.451,19.625 41.451,19.249 41.6,19.1 42.1,19.1 42.375,18.825 R63.2@42.375,18.7 ; X8.0@41.875,23.963 IC5.6@41.875,23.535 ; v1(42.65,21.325) v1@42.575,21.4 ; X8.0@43.02,24.023 C42.2@43.02,23.535 IC5.6@41.875,23.535 ; C43.2@44.425,22.82 44.206,22.82 42.786,21.4 v1@42.575,21.4 ; 11.751,13.35 v1(12.251,13.85) ; IC6.H2@11.751,14.85 IC6.G2@11.751,14.35 IC6.G3@12.251,14.35 v1(12.251,13.85) ; IC6.H2@11.751,14.85 v1(11.751,15.35) ; v1(11.751,17.35) IC6.P3@12.251,17.85 IC6.N4@12.751,17.35 v1(13.251,17.85) IC6.N6@13.751,17.35 14,17.35 14.251,17.099 IC6.L7@14.251,16.35 ; v1(12.251,13.85) IC6.F4@12.751,13.85 IC6.E4@12.751,13.35 IC6.D5@13.251,12.85 ; IC6.C4@12.751,12.35 IC6.D5@13.251,12.85 ; IC6.D5@13.251,12.85 IC6.D6@13.751,12.85 14.1,12.85 ; IC6.L7@14.251,16.35 14.55,16.35 14.751,16.149 ; IC6.C10@15.751,12.35 v1(16.251,11.85) IC6.C12@16.751,12.35 ; 16.575,14.35 16.751,14.526 IC6.H12@16.751,14.85 ; 16.575,14.35 16.751,14.174 v1(16.751,13.85) IC6.E12@16.751,13.35 IC6.C12@16.751,12.35 ; IC6.C12@16.751,12.35 IC6.B13@17.251,11.85 v1(17.751,12.35) ; IC6.H12@16.751,14.85 v1(17.251,14.85) ; IC5.6@41.875,23.535 IC5.6@41.875,23.475 41.875,22.975 IC5.EP@41.375,22.475 41.875,21.975 IC5.10@41.875,21.475 42.5,21.475 v1@42.575,21.4
  Bottom w0.25: v1(1.45,13.175) 1.95,13.175 2.25,13.475 4.075,13.475 v2(4.287,13.688) ; IC20.2@1.725,17.763 v2@1.725,18.65 ; v4(8.25,21.1) 8.55,21.4 IC17.21@10.1,21.4 10.53,21.4 10.875,21.055 C189.1@10.975,21.055 ; C162.2@16.68,29.175 17.075,28.78 17.075,27.975 v1@17.15,27.9 ; C173.2@29.73,28.75 29.955,28.525 30.625,28.525 v1(30.625,28.775) ; IC1.K4@33.596,17.343 v1(33.929,17.01) ; v1@40.483,7 T6.2@40.483,7.38 T6.5@40.483,8.23 v1@40.483,8.6 ; v1(41,11.5) 41.003,11.503 41.003,11.847 C47.2@41.005,11.85 ; T1.2@41.451,19.625 T1.5@41.451,20.475
  Bottom w0.3: v1(-0.175,14.25) -0.166,14.25 0.026,14.442 0.169,14.442 R135.1@0.169,14.467 ; R85.2@0.225,23.905 v2(0.225,24.125) ; v2(1.475,14.725) C206.1@1.475,15.049 ; C230.1@1.72,0.675 1.72,0.845 2.025,1.15 C225.1@2.025,2.475 ; R88.1@2.22,21.775 2.22,21.921 2.605,22.306 R77.1@2.605,22.425 v2@2.605,22.775 ; C132.2@2.52,25.325 2.52,25.212 2.515,25.207 C131.1@2.515,24.675 2.515,24.485 v1(2.9,24.1) ; v1(2.875,20.45) 2.9,20.425 C199.1@3.37,20.425 C199.1@3.37,20.4 ; IC7.2@3.75,22.95 3.9,23.1 3.996,23.1 4.946,24.05 IC17.9@5.95,24.05 5.95,23.4 v4(7.15,22.2) ; C201.1@4.505,19.25 IC17.32@5.95,19.25 5.95,19.9 v4(7.15,21.1) 7.45,21.4 IC17.4@7.7,21.65 ; C224.1@6.325,2.475 6.325,1.775 v1(6.4,1.7) 6.675,1.425 C174.2@6.675,1.11 ; v1@8.336,13.7 v1(8.35,13.7) ; v1@10,1.23 v1@10.475,1.23 ; 12.147,19.675 12.545,20.073 12.545,21.02 12.75,21.225 v1(12.85,21.225) ; v2@14.025,28.875 14.16,28.74 C169.2@14.255,28.74 ; v1(15.65,19.598) R128.2@15.65,19.895 ; v1(16.85,4.975) v1(17.325,4.975) ; C203.1@19.848,25.048 20.065,25.265 20.14,25.265 v1(20.15,25.275) ; R15.1@20.3,14.125 v1(20.525,14.125) ; v1@23.4,18.215 IC1.J33@23.938,17.676 ; C79.1@24.175,7.73 24.315,7.87 C71.2@24.315,8.4 ; v1(25.075,28.95) v1@25.089,28.95 ; C87.2@25.195,21.45 25.195,20.855 v1(25.825,20.225) ; v1@25.415,8.007 C72.2@25.415,8.4 ; C73.2@26.515,8.4 26.515,7.835 v1(26.625,7.725) ; R127.2@27.48,24.925 v2(27.48,25.215) ; v1@27.595,8.007 C103.2@27.595,8.4 ; v1(28.625,27.4) 28.639,27.4 28.709,27.47 C161.1@28.925,27.47 ; C86.2@28.706,8.4 28.706,8.793 28.825,8.911 v2(28.825,8.925) ; v1(30.45,7.9) 30.45,7.914 30.355,8.009 C74.2@30.355,8.4 30.355,8.645 30.25,8.75 30.25,10.002 v1(30.598,10.35) v1(30.932,10.683) ; C163.1@30.625,28.45 C163.1@30.625,28.525 ; v1(30.7,22.3) 31,22.3 31.4,22.7 R217.2@31.57,22.7 ; v1(30.8,24.5) 30.81,24.51 30.845,24.51 30.86,24.525 31.395,24.525 31.55,24.68 C262.2@31.575,24.68 ; v1(31.25,8.975) 32.67,7.555 ccw(c33.95,8.836) 33.95,7.025 v1(34.7,7.025) ; C248.2@32.03,0.7 32.03,0.741 32.925,1.636 v1(32.925,1.85) ; 33.75,3.725 v1(34,3.725) ; v1(34.575,11.675) 34.795,11.455 C85.2@36.495,11.455 ; IC2.7@34.65,1.925 IC2.PAD@35.75,1.925 ; IC2.PAD@36.3,2.3 36.3,2.9 ; C80.2@36.35,17.755 36.49,17.895 38.905,17.895 39.39,17.41 C33.1@39.9,17.92 ; IC14.7@36.625,28.6 IC14.PAD@37.275,28.6 ; IC2.PAD@36.85,1.925 IC2.2@37.45,1.925 ; IC2.4@37.45,0.925 IC2.3@37.45,1.425 IC2.2@37.45,1.925 ; IC2.1@37.45,2.425 IC2.2@37.45,1.925 ; IC14.PAD@38.025,28.35 38.775,27.6 IC14.4@39.425,27.6 ; IC14.PAD@38.775,28.1 IC14.3@39.425,28.1 ; IC14.PAD@38.775,28.6 IC14.2@39.425,28.6 39.875,28.6 v1@40.025,28.75 ; IC14.PAD@38.775,29.1 IC14.1@39.425,29.1 ; v1(38.95,5.775) v1(39.525,5.775) ; IC9.2@39.35,2.8 39.35,2.425 39.575,2.2 v1@40.25,2.2 ; IC16.4@39.925,25.35 40.425,25.35 40.6,25.175 X8.0@41.375,25.175 ; 40.025,29.08 X8.0@41.8,29.08 ; v1@40.062,6.588 v1(40.475,7) ; v1(40.275,2.175) v1@40.25,2.2 ; C166.2@40.385,0.4 41.125,0.4 X8.0@41.425,0.7 ; T4.1@41.385,9.415 41.5,9.53 v1(41.5,9.925) ; X8.0@41.5,2.2 v1@40.25,2.2 ; R63.2@42.375,18.7 42.375,18.4 42.8,17.975 X6.12@43.142,17.975 ; v2(45.45,9.85) 45.825,10.225 X3.9@46.207,10.225 X3.7@46.207,10.825 ; X8.0@45.8,5.1 X8.0@46.207,5.507 ; X6.MP2@45.932,16.09 X6.15@45.932,17.075 ; X3.1@46.08,12.65 46.08,14.425 ; X6.1@46.207,21.275 X8.0@46.207,24.425
  Bottom w0.35: X8.18@-1.275,16.65 -0.875,16.25 v1(-0.5,16.25) ; v1(10,1.225) 10,1.1 C260.1@10.4,0.7 ; C260.1@10.475,0.907 v1(10.475,1.225) ; 10.676,5.975 11.1,5.975 C227.1@11.1,6.399 ; C226.1@12.175,6.9 12.175,6.85 12.25,6.775 12.3,6.775 12.6,6.475 14.525,6.475 ; 14.53,6.475 14.605,6.55 15.325,6.55 ; v1(16.85,4.975) C252.1@16.85,5.45 ; T3.1@39.525,5.26 v1(39.525,5.775) ; C49.2@41.675,12.63 v1(41.675,13)
  Bottom w0.4: C225.1@2.05,2.225 IC22.PAD@3.225,2.225 ; v2(2.625,22.775) 2.8,22.95 IC7.2@3.75,22.95 ; IC22.PAD@3.225,2.1 IC22.PAD@3.7,1.625 ; v1(3.8,0.525) 4.125,0.525 4.175,0.575 IC22.2@4.175,0.675 ; X8.0@42.475,5.715 42.475,6.175 ; X8.0@46.257,5.432 X3.15@46.257,8.35
  Bottom w0.5: X8.40@-2.575,7.85 X8.40@-2.5,7.85 v1@-1,7.85 ; X8.50@-2.5,3.85 -1,3.85 v1(-0.875,3.975) v1(-0.875,4.5) ; IC22.2@4.175,0.675 IC22.PAD@4.175,1.65 ; C255.1@10.625,5.2 C227.1@10.625,6.5 ; C227.1@10.9,6.775 C226.1@12.2,6.775
  Bottom w0.6: X8.26@-2.625,13.45 X8.26@-2.5,13.45 v1@-1.075,13.45 ; X8.4@-2.625,25.45 v1@-0.625,25.45 ; X8.34@-2.5,10.25 -1.075,10.25 ; X8.18@-2.5,16.65 X8.18@-1.275,16.65
  other v1: 5.65,0.475 29.25,1.175 29.7,1.175 16.85,1.225 17.325,1.225 22.375,1.25 22.85,1.25 35.35,2.1 -0.325,2.425 13.575,2.475 37.35,3.7 33.1,4.375 37.5,4.575 22.8,4.925 23.2,4.925 10.4,4.975 29,4.975 29.475,4.975 10,5.1 32.7,5.475 31.675,5.55 11.45,5.825 21.4,6.95 33.025,7.275 21.025,7.475 14.85,7.775 -0.925,7.85 24.325,7.975 25.4,7.975 27.6,8.025 33.75,8.475 37.367,8.85 15.55,8.95 14,9.05 43.1,9.15 14.825,9.6 43.092,11.9 37.175,12.25 -0.95,12.4 -0.95,12.875 40.45,13.3 -0.95,13.449 40.1,13.65 40.45,14 35.925,14.45 38.75,14.625 36.85,14.95 -0.975,15.425 33.929,16.344 25.475,16.559 45.925,17.075 39.45,17.35 37.45,17.7 34.262,18.009 42.475,18.425 5.5,18.535 45.875,19.2 17.575,19.525 41.45,20.05 43.325,20.525 4.15,21.05 35.025,21.225 -0.95,21.3 -0.95,21.725 18.725,21.75 13.75,21.9 37.925,22.175 29.475,22.275 41.175,22.35 34.65,22.7 22.275,22.875 -0.975,23.125 17.915,23.125 18.375,23.125 38.425,23.525 -0.975,23.675 15.375,24.775 -0.975,25.399 -0.525,25.4 5.475,25.544 18.8,25.825 17.475,26.725 7.25,26.825 34,26.9 10.625,27.2 13.6,27.325 18.375,27.45 15.725,27.475 1.75,27.8 17.125,27.95 33.925,28.35 11.15,28.675 40,28.75
  other v2: 20.65,9.15 43.125,12.975 1.7,18.65 27.268,19.674 25.5,23.325 22.425,25.4 1.35,26.35 14.025,28.85
  other v3: 4.175,9.125 4.175,10.225 5.275,10.225 28.065,12.34 29.065,12.35 30.065,12.34 27.065,13.34 28.065,13.34 30.065,13.34 27.065,14.34 28.065,14.34 30.065,14.34 27.065,15.34 28.065,15.34 30.065,15.34 27.065,16.34 28.065,16.34 30.065,16.34 28.065,17.34 29.065,17.35
  other v4: 27.065,12.34 5.075,15.825
GNSS_1PPS: IC11.6 R169.1 | length 9.1
  Top w0.15: IC11.6@8.3,28.25 8.725,27.825 8.725,27.55 9.7,26.575 10,26.575 v1(11.15,25.425) v1@11.105,25.425
  Bottom w0.15: v1(11.15,25.425) 11.105,25.425 10.8,25.12 10.8,24.83 11.005,24.625 11.007,24.625 11.36,24.272 11.36,24.269 11.379,24.25 14.32,24.25 R169.1@14.545,24.025
GNSS_ANT: ESD4.1 IC11.3 L1.1 X5.1 | length 4.6
  Top w0.18: X5.1@2.675,25.625 2.675,25.062 ccw(c3.062,25.062) 3.062,24.675 ESD4.1@3.25,24.675 4.4,24.675 6.325,24.675 cw(c6.325,24.55) IC11.3@6.45,24.55
GNSS_FIX: IC11.13 IC15.21 | length 42.6
  Top w0.15: v1(7.25,27.487) 10.3,24.437 10.3,22.85 10.7,22.45 12.65,22.45 13.475,21.625 13.475,21.225 IC11.13@13.85,20.85
  L4 w0.1: v1(0.225,8.55) 0.225,8.838 0.93,9.543 0.93,10.595 0.275,11.25 0.275,12.97 1.005,13.7 1.292,13.7 1.975,14.383 1.975,14.67 2.275,14.97 2.275,15.526 3.304,16.555 3.304,16.879 3.675,17.25 3.675,18.325 3.45,18.55 3.45,19.925 3.275,20.1 2.704,20.1 2.504,20.3 2.504,21.048 1.625,21.926 1.625,23.475 0.875,24.225 0.875,25.35 2.4,26.875 4.375,26.875 5.3,27.8 6.892,27.8 7.205,27.487 v1(7.25,27.487)
  Bottom w0.15: v1(0.225,8.55) 0.225,7.58 0.555,7.25 2.775,7.25 IC15.21@2.775,6.75
GNSS_HW_R: C169.1 IC11.7 | length 4.8
  Top w0.3: IC11.7@10.15,28.25 10.5,28.6 10.636,28.6 10.661,28.625 v1(10.675,28.625)
  Bottom w0.15: v1(10.675,28.625) 10.675,29 11.05,29.375 14.18,29.375 C169.1@14.255,29.3
GNSS_HW_S: C174.1 IC11.8 | length 55.8
  Top w0.15: v1(7.35,28.375) 7.35,28.75 7.525,28.925 8.872,28.925 9.025,28.772 9.025,27.63 9.805,26.85 10.875,26.85 11.25,27.225 11.25,27.5 IC11.8@12,28.25
  L4 w0.1: v1(6.075,0.75) 5.3,1.525 1.975,1.525 0.975,2.525 0.075,2.525 -0.225,2.825 -0.9,2.825 -2.475,4.4 -2.475,16.675 -1.675,17.475 0.6,17.475 1.304,18.179 1.304,19.754 0.758,20.3 -1.366,20.3 -1.975,20.909 -1.975,25.892 -1.067,26.8 0.275,26.8 1.6,28.125 4.675,28.125 5.3,28.75 6.017,28.75 6.167,28.6 7.125,28.6 v1(7.35,28.375)
  Bottom w0.25: v1(6.075,0.75) 6.275,0.55 C174.1@6.675,0.55
GNSS_RXD: IC12.10 pad.2@10.125,29.325 R109.1 | length 27.8
  Top w0.15: pad.2@10.125,29.325 10.995,29.325 11.395,28.925 12.575,28.925 13.125,28.375 13.125,27.9 11.875,26.65 11.875,25.15 11.05,24.325 11.05,23.375 11.475,22.95 12.538,22.95 13.438,23.85 13.975,23.85 15.025,22.8 15.025,22.43 14.495,21.9 v1(14.2,21.9)
  L6 w0.1: v1(14.2,21.9) 14.2,22.499 13.525,23.174 13.525,25.326 14.899,26.7 15.825,26.7 16.475,27.35 17.65,27.35 18.075,27.775 18.56,27.775 18.885,27.45 v2(18.925,27.45)
  Bottom w0.15: R109.1@17.95,28.72 18.405,28.72 18.7,28.425 18.7,28.1 IC12.10@18.725,28.075 18.734,28.066 18.734,27.641 v2(18.925,27.45)
GNSS_RXD_LS: IC6.P9 IC12.3 | length 10.5
  Bottom w0.1: IC6.P9@15.251,17.85 15.551,18.15 15.551,18.64 15.975,19.064 15.975,19.875 16.675,20.575 16.675,21.742 16.775,21.842 16.775,24.283 17.792,25.3 18.367,25.3 18.475,25.408 18.475,26.035 18.675,26.235 18.675,26.475 IC12.3@18.725,26.525
GNSS_TXD: C167.1 FR35.1 IC12.11 pad.2@12,29.325 | length 14.1
  Top w0.15: pad.2@12,29.325 12.75,29.325 13.05,29.025 v1(13.55,29.025) 14.375,29.025 14.537,28.863 14.907,28.863 15.15,28.62 ; FR35.1@14.9,26.905 14.922,26.905 15.15,27.133 15.15,28.62 ; C167.1@15.545,29.025 15.545,29 15.47,28.925 15.455,28.925 15.15,28.62
  L6 w0.1: v1(13.55,29.025) 13.55,28.775 14.15,28.175 14.959,28.175 15.225,28.441 15.225,28.717 15.708,29.2 18.025,29.2 18.875,28.35 19.114,28.35 v2@19.442,28.678
  Bottom w0.1: IC12.11@19.125,28.075 19.125,28.312 v2@19.481,28.669
  other v2: 19.45,28.7
GNSS_TXD_LS: IC6.P10 IC12.2 | length 10.5
  Bottom w0.1: IC6.P10@15.751,17.85 15.751,18.067 15.751,18.557 16.175,18.981 16.175,19.792 16.875,20.492 16.875,21.659 16.975,21.759 16.975,24.2 17.875,25.1 18.55,25.1 19.125,25.675 IC12.2@19.125,26.525
I2C_SDA_SEL: IC15.28 IC23.6 R188.1 | length 30.9
  L6 w0.1: v1(-0.225,7.225) -0.225,6.275 1.425,4.625 9.183,4.625 12.658,1.15 15.9,1.15 16.55,1.8 20.237,1.8 v1(20.64,2.203)
  Bottom w0.15: v1(-0.225,7.225) -0.225,8.675 -0.025,8.875 -0.025,10.275 -0.2,10.45 -0.2,10.911 0.064,11.175 0.942,11.175 1.3,11.533 1.3,11.55 1.375,11.625 IC15.28@1.8,11.625
  Bottom w0.3: v1(-0.225,7.225) -0.211,7.225 -0.086,7.1 R188.1@0.075,7.1
JTAG_RST: D3.C R90.2 | length 1.5
  Top w0.2: D3.C@14.9,19.65 15.025,19.65 15.348,19.973 15.857,19.973 16.075,19.755 16.075,19.73 16.125,19.68 R90.2@16.15,19.68
LA_CFG_BOOT_HO: IC6.R14 R114.2 R124.1 | length 20
  Bottom w0.1: IC6.R14@17.751,18.35 18.25,18.849 18.25,19.267 19.6,20.617 19.6,21.967 19.8,22.167 19.8,24.017 20.558,24.775 21.576,24.775 21.651,24.85 21.658,24.85 25.867,24.85 26.367,24.35 27.733,24.35 28.05,24.667 28.05,25.367 28.508,25.825 29.075,25.825 29.25,25.65 29.692,25.65 30,25.958 30,26.23 30.2,26.43 30.2,26.455 30.3,26.555 R124.1@30.325,26.555 R114.2@30.325,27.27
LA_CFG_BOOT_SRC0: IC6.M14 JP1.1 R112.2 R122.1 | length 29.6
  Bottom w0.1: IC6.M14@17.751,16.85 18.051,16.55 18.417,16.55 18.517,16.65 20.35,16.65 20.725,17.025 20.725,18.424 20.875,18.574 20.875,19.8 20.4,20.275 20.4,21.636 20.6,21.836 20.6,23.686 20.889,23.975 21.908,23.975 21.983,24.05 21.989,24.05 25.536,24.05 26.036,23.55 28.075,23.55 29.025,24.5 29.35,24.5 29.675,24.825 29.985,24.825 29.998,24.825 30.248,25.075 30.837,25.075 31.037,25.275 31.075,25.275 31.575,25.275 31.775,25.475 32.275,25.475 32.425,25.625 32.967,25.625 33.125,25.783 33.125,26.055 R122.1@33.625,26.555
  Bottom w0.15: R112.2@32.875,29.09 33.16,29.09 33.3,28.95 33.3,28.15 34,27.45 ; R122.1@33.625,26.555 33.625,27.075 34,27.45 ; JP1.1@35.075,27.24 34.46,27.24 34.25,27.45 34,27.45
LA_CFG_BOOT_SRC1: IC6.P15 R113.2 R120.1 R123.1 | length 30.3
  L6 w0.1: v1(24.3,25.625) 24.625,25.95 26.517,25.95 26.642,25.825 27.725,25.825 28.05,26.15 29.065,26.15 29.425,26.51 29.425,27.1 29.75,27.425 v2(31.7,27.425)
  Bottom w0.1: IC6.P15@18.251,17.85 18.65,18.249 18.65,19.101 20,20.451 20,21.801 20.2,22.001 20.2,23.851 20.724,24.375 21.742,24.375 21.817,24.45 21.824,24.45 25.701,24.45 26.201,23.95 27.9,23.95 29.175,25.225 29.833,25.225 30.083,25.475 30.671,25.475 30.871,25.675 30.909,25.675 31.375,25.675 31.525,25.825 31.525,26.105 31.85,26.43 31.85,26.455 31.95,26.555 R123.1@31.975,26.555 R113.2@31.975,27.27
  Bottom w0.3: v1(24.3,25.625) 24.31,25.615 24.31,25.545 24.405,25.45 R120.1@24.405,25.425 ; v2(31.7,27.425) 31.714,27.425 31.869,27.27 31.975,27.27 R113.2@32.05,27.27
LA_CFG_PCIE_GEN: IC6.P13 R119.2 R129.1 R131.1 | length 20.6
  Bottom w0.1: IC6.P13@17.251,17.85 17.451,18.05 17.451,18.474 18.05,19.073 18.05,19.35 19.4,20.7 19.4,22.05 19.6,22.25 19.6,24.1 20.475,24.975 21.493,24.975 21.568,25.05 21.575,25.05 25.95,25.05 26.45,24.55 27.65,24.55 27.85,24.75 27.85,25.45 28.425,26.025 28.961,26.025 29.491,26.555 R129.1@29.5,26.555 29.5,27.22 R119.2@29.5,27.27
  Bottom w0.2: R131.1@28.75,26.93 28.8,26.98 29.043,26.98 29.283,27.22 29.5,27.22 29.525,27.22 R119.2@29.575,27.27
LA_CFG_RST_HNDSHK: IC6.P14 R115.2 R121.1 R125.1 | length 21.5
  Top w0.15: R121.1@28.025,24.575 28.1,24.65 28.1,24.825 v1(28.412,25.138)
  Bottom w0.1: IC6.P14@17.751,17.85 18.45,18.549 18.45,19.184 19.8,20.534 19.8,21.884 20,22.084 20,23.934 20.641,24.575 21.659,24.575 21.734,24.65 21.741,24.65 25.784,24.65 26.284,24.15 27.816,24.15 28.412,24.747 v1(28.412,25.138) 28.8,25.138 29.087,25.425 29.75,25.425 30,25.675 30.588,25.675 30.725,25.812 30.725,26.13 31.025,26.43 31.025,26.455 31.125,26.555 R125.1@31.15,26.555 R115.2@31.15,27.27
LA_CFG_TEST_PORT_DIS: IC6.M15 IC10.3 R116.2 R126.1 | length 32.7
  L6 w0.1: v2(26.375,26.7) 27.65,27.975 32.775,27.975 v2(33.35,27.4)
  Bottom w0.1: IC6.M15@18.251,16.85 20.267,16.85 20.525,17.108 20.525,18.506 20.675,18.656 20.675,19.717 20.2,20.192 20.2,21.719 20.4,21.919 20.4,23.769 20.806,24.175 21.825,24.175 21.9,24.25 21.906,24.25 25.619,24.25 26.119,23.75 27.992,23.75 29.267,25.025 29.916,25.025 30.166,25.275 30.754,25.275 30.954,25.475 30.992,25.475 31.492,25.475 31.692,25.675 32.192,25.675 32.3,25.783 32.3,26.055 32.675,26.43 32.675,26.455 32.775,26.555 R126.1@32.8,26.555 R116.2@32.8,27.27
  Bottom w0.15: R116.2@32.875,27.27 32.9,27.27 33.03,27.4 v2(33.35,27.4)
  Bottom w0.2: IC10.3@26.375,26.3 IC10.3@26.375,26.525
LA_DCS_CLK_N: IC6.F2 R86.2 | length 4
  Bottom w0.1: R86.2@8.275,14.67 8.3,14.67 8.4,14.57 8.4,14.545 8.595,14.35 8.81,14.35 8.985,14.525 11.076,14.525 IC6.F2@11.751,13.85
LA_DCS_CLK_P: IC6.F1 R82.2 | length 4.1
  Bottom w0.1: R82.2@7.625,14.67 7.65,14.67 7.75,14.57 7.75,14.545 7.945,14.35 8.175,14.35 8.375,14.15 8.925,14.15 9.1,14.325 10.776,14.325 IC6.F1@11.251,13.85
LA_GPIO_05: IC6.L13 TP2.1 | length 25.2
  Top w0.15: TP2.1@26.15,22.875 26.175,22.9 28.25,22.9 v1(29.85,24.5)
  Bottom w0.1: IC6.L13@17.251,16.35 18.5,16.35 18.6,16.45 20.433,16.45 20.925,16.942 20.925,18.341 21.075,18.491 21.075,19.917 20.775,20.217 20.775,21.043 21.1,21.368 21.1,22.515 20.8,22.815 20.8,23.603 20.972,23.775 21.99,23.775 22.065,23.85 22.072,23.85 25.453,23.85 25.953,23.35 28.175,23.35 28.75,23.925 28.962,24.138 29.487,24.138 v1(29.85,24.5)
LA_GPIO_06: IC6.K15 TP3.1 | length 11.6
  Top w0.15: v1(22.2,23.525) 22.2,23.8 22.55,24.15 TP3.1@22.55,24.375
  Bottom w0.1: IC6.K15@18.251,15.85 18.567,15.85 18.967,16.25 20.516,16.25 21.125,16.859 21.125,18.258 21.275,18.408 21.275,20 20.975,20.3 20.975,20.96 21.3,21.285 21.3,22.508 21.725,22.933 21.725,23.083 22.108,23.465 v1@22.2,23.465
LA_HRESET: D1.A D2.A D3.A IC6.K13 R73.2 | length 13.7
  Top w0.15: D3.A@14.9,18.9 14.925,18.875 15,18.8 15.525,18.8 15.59,18.735 17.41,18.735 17.495,18.65 R73.2@17.495,18.625
  Top w0.2: D3.A@14.892,18.875 14.925,18.875 v1(15.2,18.875) ; v1(17.251,15.85) D2.A@17.251,16.475
  Top w0.25: D1.A@10.2,18.4 10.2,19.4 10.45,19.65 14.057,19.65 14.7,19.007 14.7,18.975 14.775,18.9 D3.A@14.9,18.9
  L3 w0.1: v1(15.2,18.875) 17.251,16.824 v1(17.251,15.85)